# Altium PCB Pallette v1.PcbDoc
Units mm, origin at the board's own origin, x right, y up, seen from the top; angles counter-clockwise.
Board outline 152.4 x 101.6 mm, 2 copper layers (Top Layer, Bottom Layer); 44 components, 34 nets, 202 pads, 0 vias.
Unrouted connection lines stored in the file: 137.
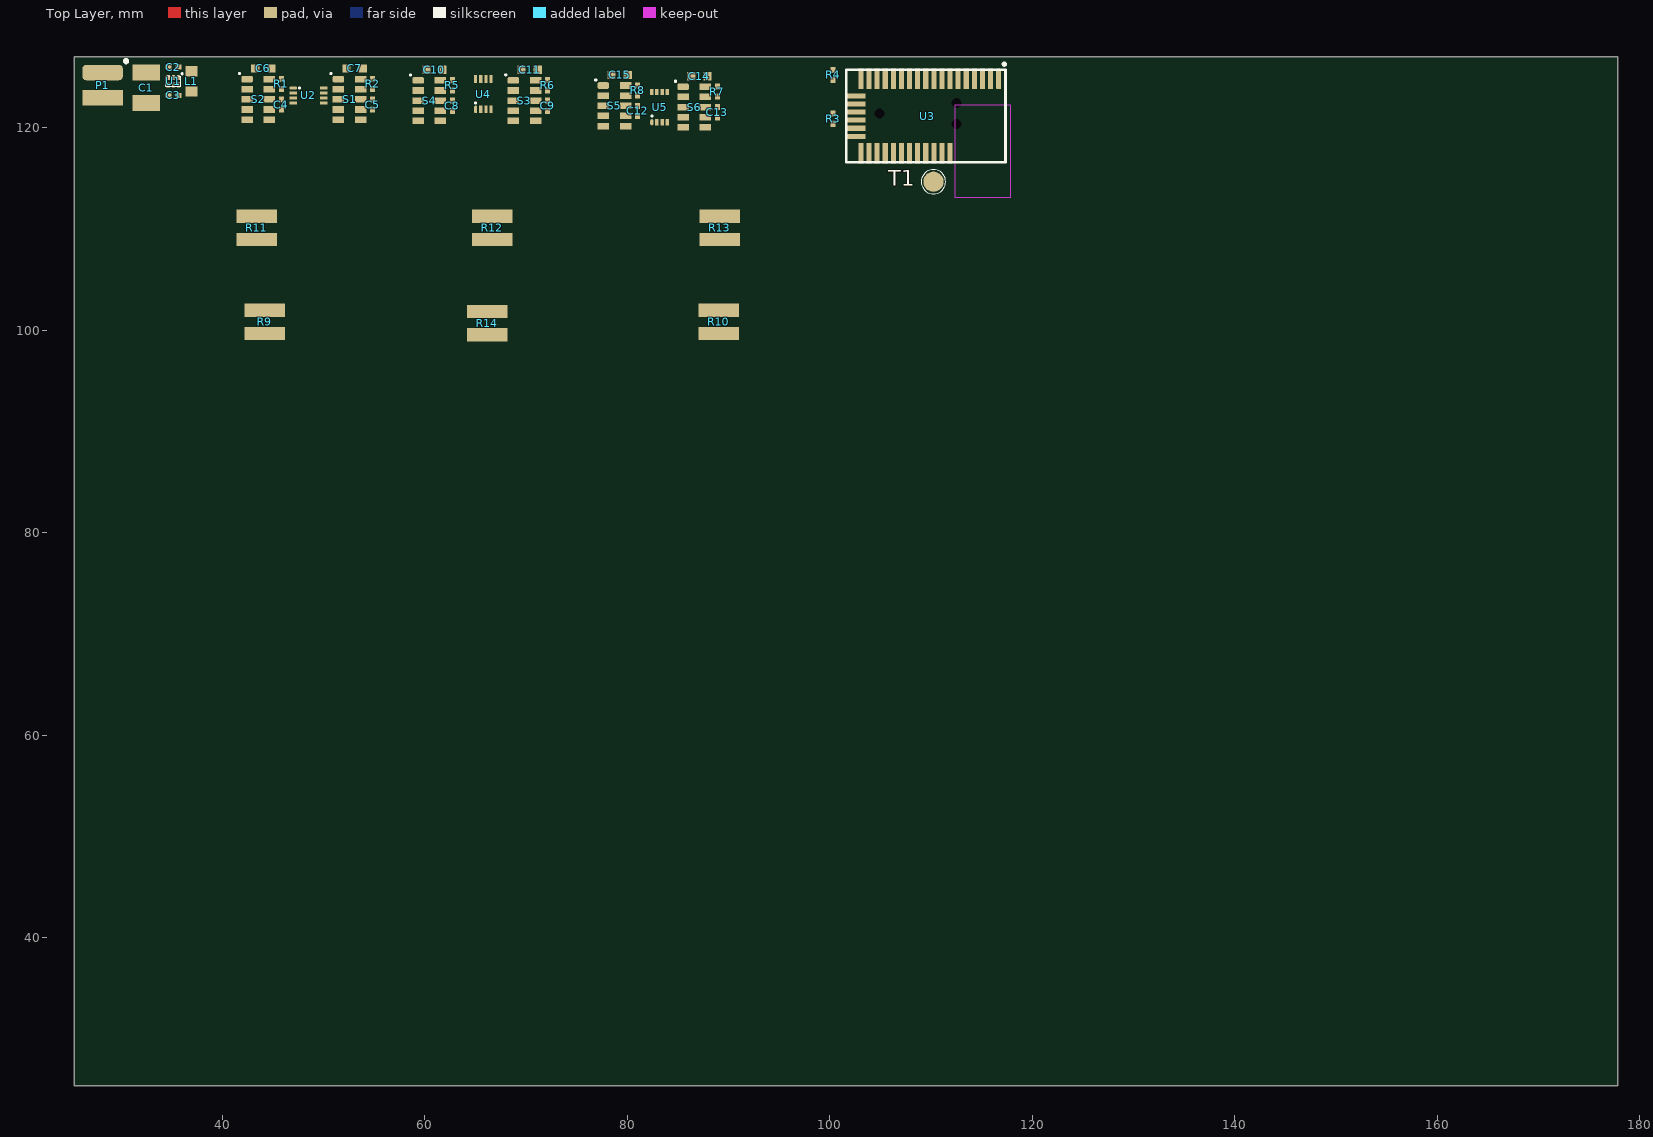
[diagram p0: Top Layer view]
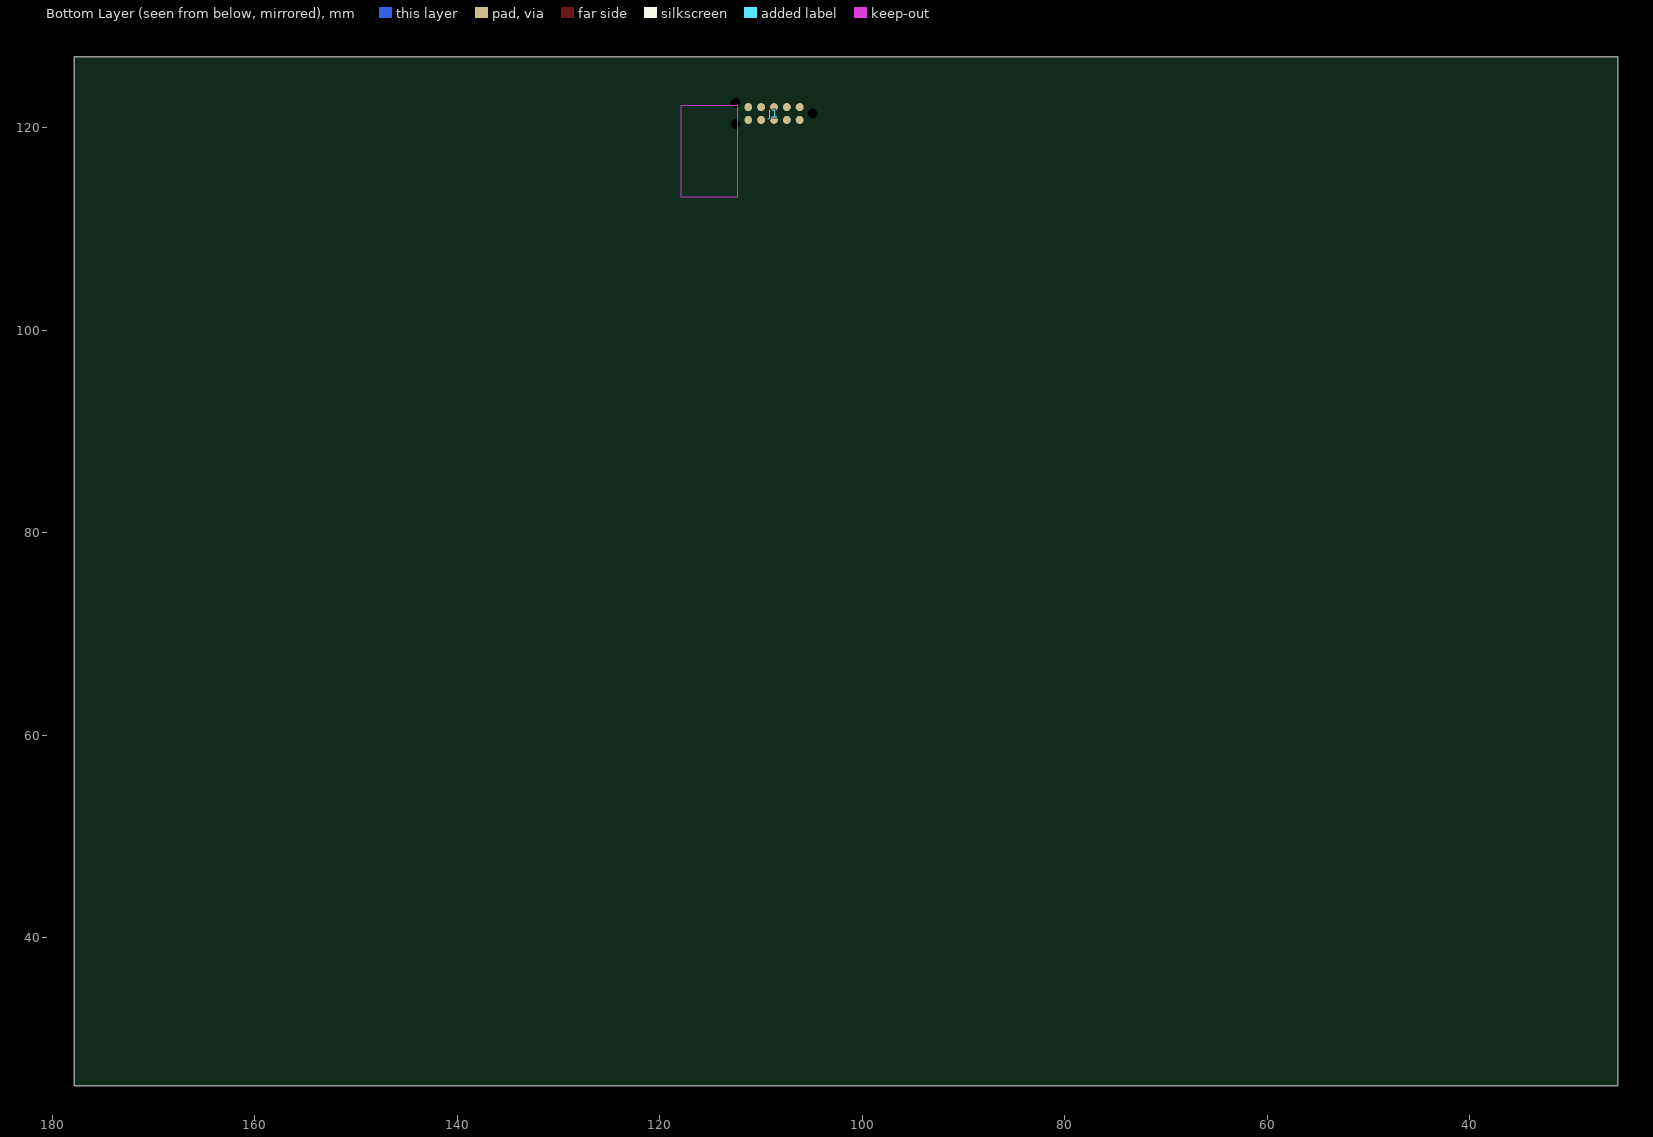
[diagram p1: Bottom Layer view, seen from below]

## Layer stack, top to bottom
Top Solder: solder mask 0.0102, Solder Resist, Dk 3.5
Top Layer: signal copper 0.0356
Dielectric 1: dielectric 0.32, FR-4, Dk 4.8
Bottom Layer: signal copper 0.0356
Bottom Solder: solder mask 0.0102, Solder Resist, Dk 3.5

## Board outline
25.4,25.4 177.8,25.4 177.8,127 25.4,127

## Design rules (kind name [scope] priority, off if disabled: settings)
Clearance [All] p1: gap=0.125
ComponentClearance [All] p1: gap=0.1 collisioncheckmode=3 verticalgap=0.1 showdistances=FALSE
MinimumSolderMaskSliver [All] p1: minsoldermaskwidth=0.125
PolygonConnect [All] p1: connectstyle=Relief reliefconductorwidth=0.254 reliefentries=4 polygonreliefangle="90 Angle" airgapwidth=0.254
RoutingVias [All] p1: holewidth=0.711 width=1.27 viastyle="Through Hole" minholewidth=0.711 minwidth=1.27 maxholewidth=0.711 maxwidth=1.27
SolderMaskExpansion [All] p1: expansion=0.102
Width [All] p1: maxlimit=2.54 minlimit=0.254 preferedwidth=0.508
28 further rules are at their usual default settings.

## Components (designator, comment, footprint, x,y, rotation, side; value= is the part's Value field where it differs from the comment)
C1 "Cap Pol 100uF" 1411 32.512,123.952 r270 top
C2 "Cap 2.2uF" 0402 35.179,125.984 r180 top
C3 "Cap 2.2uF" 0402 35.179,123.19 r0 top
C4 "Cap 100nF" 0402 45.847,122.301 r270 top
C5 "Cap 100nF" 0402 54.864,122.301 r270 top
C6 "Cap 22uF" 0603 44.069,125.857 r0 top
C7 "Cap 22uF" 0603 53.086,125.857 r0 top
C8 "Cap 100nF" 0402 62.738,122.174 r270 top
C9 "Cap 100nF" 0402 72.136,122.174 r270 top
C10 "Cap 22uF" 0603 60.96,125.73 r0 top
C11 "Cap 22uF" 0603 70.358,125.73 r0 top
C12 "Cap 100nF" 0402 81.026,121.666 r90 top
C13 "Cap 100nF" 0402 88.9,121.539 r90 top
C14 "Cap 22uF" 0603 87.122,125.095 r0 top
C15 "Cap 22uF" 0603 79.248,125.222 r0 top
J1 "Header Program" TC2050-IDC-NL 108.712,121.412 r0 bottom
L1 "Ind 2.2uH" 0805 36.957,124.587 r270 top
P1 "Header Battery" "Battery Leads" 28.194,124.206 r0 top
R1 "Res 30R" 0402 45.847,124.333 r270 top
R2 "Res 30R" 0402 54.864,124.333 r270 top
R3 "Res 4.7K" 0402 100.33,120.904 r90 top
R4 "Res 4.7K" 0402 100.33,125.222 r90 top
R5 "Res 30R" 0402 62.738,124.206 r270 top
R6 "Res 30R" 0402 72.136,124.206 r270 top
R7 "Res 30R" 0402 88.9,123.571 r270 top
R8 "Res 30R" 0402 81.026,123.698 r270 top
R9 "FSR 400 Short" "FSR 400 Short" 44.196,100.838 r0 top
R10 "FSR 400 Short" "FSR 400 Short" 89.027,100.838 r0 top
R11 "FSR 400 Short" "FSR 400 Short" 43.434,110.109 r0 top
R12 "FSR 400 Short" "FSR 400 Short" 66.675,110.109 r0 top
R13 "FSR 400 Short" "FSR 400 Short" 89.154,110.109 r0 top
R14 "FSR 400 Short" "FSR 400 Short" 66.167,100.711 r0 top
S1 "Si1141-M01" SI1141-M01 52.578,122.809 r0 top
S2 "Si1141-M01" SI1141-M01 43.561,122.809 r0 top
S3 "Si1141-M01" SI1141-M01 69.85,122.682 r0 top
S4 "Si1141-M01" SI1141-M01 60.452,122.682 r0 top
S5 "Si1141-M01" SI1141-M01 78.74,122.174 r0 top
S6 "Si1141-M01" SI1141-M01 86.614,122.047 r0 top
T1 "TP" TP 110.236,114.681 r90 top
U1 "TPS62730" 6-UFDFN 35.179,124.587 r180 top
U2 "74LVC2G125" VSSOP8#1 48.514,123.19 r270 top
U3 "BLE113" BLE113-A 109.601,121.158 r270 top
U4 "74LVC2G125" VSSOP8#1 65.786,123.317 r0 top
U5 "74LVC2G125" VSSOP8#2 83.185,122.047 r0 top

## Footprints (in the part's own frame and the unit in brackets; to place one, negate y for a bottom-side part, rotate by r counter-clockwise, add the part's x,y. Pads: shape width x height; smd on the part's side, far side on the other; paste and mask are expansions set on the pad)
6-UFDFN [mm] "Body 1.5x1.0mm"
  rrect50% 0.3x0.5 smd mask+0.05: 1(-0.5,-0.375)
  rect 0.3x0.5 smd mask+0.05: 2(0,-0.375) 3(0.5,-0.375) 4(0.5,0.375) 5(0,0.375) 6(-0.5,0.375)
  silkscreen extent -0.9,-0.77 0.75,0.5, body extent -0.75,-0.5 0.75,0.5, height 0.6
0402 [mm] "Body 1.0x0.5mm, IPC High Density"
  rect 0.6x0.5 smd: 1(-0.5,0) 2(0.5,0)
  body extent -0.55,-0.3 0.55,0.3, height 1.3
0603 [mm] "Body 1.6x0.8mm, IPC High Density"
  rect 0.8x0.8 smd: 1(-0.8,0) 2(0.8,0)
  body extent -0.81,-0.46 0.81,0.46, height 1.3
0805 [mm] "Body 2.0x1.25mm, IPC High Density"
  rect 1x1.2 smd: 1(-1,0) 2(1,0)
  body extent -1.02,-0.56 1.02,0.56, height 1.3
1411 [mm] "Body 3.5x2.8mm, IPC High Density"
  rect 1.6x2.7 smd: 1(-1.5,0) 2(1.5,0)
  body extent -1.52,-1.4 1.52,1.4, height 1.3
"Battery Leads" [mm]
  rrect50% 4x1.524 smd: 1(0,1.25)
  rect 4x1.524 smd: 2(0,-1.25)
  silkscreen extent 2.27,2.32 2.38,2.43
BLE113-A [mm] "Body 15.725x9.15mm"
  rrect50% 2x0.5 smd: 1(-3.675,7.075)
  rect 2x0.5 smd: 2(-3.675,6.275) 3(-3.675,5.475) 4(-3.675,4.675) 5(-3.675,3.875) 6(-3.675,3.075) 7(-3.675,2.275) 8(-3.675,1.475) 9(-3.675,0.675) 10(-3.675,-0.125) 11(-3.675,-0.925) 12(-3.675,-1.725) 13(-3.675,-2.525) 14(-3.675,-3.325) 15(-3.675,-4.125) 16(-3.675,-4.925) 17(-3.675,-5.725) 18(-3.675,-6.525) 25(3.675,-6.525) 26(3.675,-5.725) 27(3.675,-4.925) 28(3.675,-4.125) 29(3.675,-3.325) 30(3.675,-2.525) 31(3.675,-1.725) 32(3.675,-0.925) 33(3.675,-0.125) 34(3.675,0.675) 35(3.675,1.475) 36(3.675,2.275)
  rect 0.5x2 smd: 19(-2,-7.075) 20(-1.2,-7.075) 21(-0.4,-7.075) 22(0.4,-7.075) 23(1.2,-7.075) 24(2,-7.075)
  Keep-Out Layer region: -1.075,2.75 8.025,2.75 8.025,8.25 -1.075,8.25
  silkscreen extent -5.25,-7.97 4.57,7.75, body extent -4.57,-7.97 4.57,7.75, height 1.9
"FSR 400 Short" [mm] "5mm Circle x 20mm"
  rect 4x1.3 smd: 1(0,1.15) 2(0,-1.15)
  body extent -17.8,-3.8 -2,3.8, height 0.3
SI1141-M01 [mm] "Body 4.9x2.85mm"
  rrect50% 1.15x0.65 smd: 1(-1.1,2)
  rect 1.15x0.65 smd: 2(-1.1,1) 3(-1.1,0) 4(-1.1,-1) 5(-1.1,-2) 6(1.1,-2) 7(1.1,-1) 8(1.1,0) 9(1.1,1) 10(1.1,2)
  silkscreen extent -1.87,2.53 -1.83,2.57, body extent -1.43,-2.45 1.43,2.45, height 1.3
TC2050-IDC-NL [mil] "Programming pads"
  round 0 hole 39 paste-50 mask+0: 0(-150,0) 0(150,-40) 0(150,40)
  round 31 smd paste-50: 1(-100,-25) 2(-50,-25) 3(0,-25) 4(50,-25) 5(100,-25) 6(100,25) 7(50,25) 8(0,25) 9(-50,25) 10(-100,25)
TP [mm] "Test point"
  round 2 smd paste-10: 1(0,0)
  silkscreen extent -1.2,-1.2 1.2,1.2
VSSOP8#1 [mm] "Body 2.1x2.4mm"
  oval 0.3x0.75 smd mask+0.05: 1(-0.75,-1.5)
  rect 0.3x0.75 smd mask+0.05: 2(-0.25,-1.5) 3(0.25,-1.5) 4(0.75,-1.5) 5(0.75,1.5) 6(0.25,1.5) 7(-0.25,1.5) 8(-0.75,1.5)
  silkscreen extent -0.77,-0.9 -0.73,-0.85, body extent -1,-1.2 1,1.2, height 1
VSSOP8#2 [mm] "Body 2.1x2.4mm"
  oval 0.35x0.6 smd mask+0.05: 1(-0.75,-1.5)
  rect 0.35x0.6 smd mask+0.05: 2(-0.25,-1.5) 3(0.25,-1.5) 4(0.75,-1.5) 5(0.75,1.5) 6(0.25,1.5) 7(-0.25,1.5) 8(-0.75,1.5)
  silkscreen extent -0.77,-0.9 -0.72,-0.85, body extent -1,-1.2 1,1.2, height 1

## Part data
C1: "100uF Polarized Capacitor"
C2 C3: "2.2uF Capacitor"
C4 C5 C8 C9 C12 C13: "100nF Capacitor"
C6 C7 C10 C11 C14 C15: "22uF Capacitor"
J1: "CCDebugger Programming Header"
L1: "2.2uH Inductor"
P1: "Battery Leads"
R1 R2 R5 R6 R7 R8: "30R Resistor"
R3 R4: "4.7K Resistor"
R9 R10 R11 R12 R13 R14: "FSR 400 Short Force sensing resistor"
S1 S2 S3 S4 S5 S6: "Si1141-M01 IR Light Sensor"
T1: "Test point"
U1: "TPS62730 2.1V Step-Down Converter"
U2 U4 U5: "74LVC2G125 Dual bus buffer/line driver 3-state"
U3: "BLE113 Bluetooth Smart Module"

## Nets (pads, with @x,y where several pads share a name; then routed paths per layer and width w, separated by ;. In a path a pad name is that pad's centre, name@x,y a point inside that pad or via, vN(x,y) a via of type N, cw(c..) or ccw(c..) an arc to the next point about the centre after c; other vN are vias at no path point)
+2V1: C3.2 C4.2 C5.2 C8.2 C9.2 C12.2 C13.2 J1.2 L1.2 R1.2 R2.2 R3.2 R4.2 R5.2 R6.2 R7.2 R8.2 S1.4 S1.6 S1.7 S2.4 S2.6 S2.7 S3.4 S3.6 S3.7 S4.4 S4.6 S4.7 S5.4 S5.6 S5.7 S6.4 S6.6 S6.7 U1.6 U2.8 U3.8 U3.17 U4.8 U5.8
FSR1: R9.2 U3.33
FSR2: R10.2 U3.32
FSR3: R11.2 U3.31
FSR4: R12.2 U3.30
FSR5: R13.2 U3.29
FSR6: R14.2 U3.28
GND: C1.2 C2.1 C3.1 C4.1 C5.1 C6.1 C7.1 C8.1 C9.1 C10.1 C11.1 C12.1 C13.1 C14.1 C15.1 J1.1 P1.2 R9.1 R10.1 R11.1 R12.1 R13.1 R14.1 S1.8 S2.8 S3.8 S4.8 S5.8 S6.8 U1.4 U2.4 U3.1 U3.2 U3.3 U3.4 U3.5 U3.6 U3.7 U3.11 U3.13 U3.18 U3.25 U3.26 U3.27 U3.36 U4.4 U5.4
NetC6_2: C6.2 R1.1 S2.10
NetC7_2: C7.2 R2.1 S1.10
NetC10_2: C10.2 R5.1 S4.10
NetC11_2: C11.2 R6.1 S3.10
NetC14_2: C14.2 R7.1 S6.10
NetC15_2: C15.2 R8.1 S5.10
NetL1_1: L1.1 U1.2
NetS1_3: S1.3 U2.6
NetS2_3: S2.3 U2.3
NetS3_3: S3.3 U4.6
NetS4_3: S4.3 U4.3
NetS5_3: S5.3 U5.6
NetS6_3: S6.3 U5.3
NetT1: U3.34
P1_7/DCDC: U1.5 U3.12
P2_1/PROG: J1.4 U3.10
P2_2/PROG: J1.3 U3.9
S1_EN: U2.1 U3.24
S2_EN: U2.7 U3.23
S3_EN: U3.22 U4.1
S4_EN: U3.21 U4.7
S5_EN: U3.20 U5.1
S6_EN: U3.19 U5.7
SCL: R3.1 U2.2 U2.5 U3.14 U4.2 U4.5 U5.2 U5.5
SDA: R4.1 S1.2 S2.2 S3.2 S4.2 S5.2 S6.2 U3.15
VBAT: C1.1 C2.2 P1.1 U1.3
pads on no net: J1.0 J1.5 J1.6 J1.7 J1.8 J1.9 J1.10 S1.1 S1.5 S1.9 S2.1 S2.5 S2.9 S3.1 S3.5 S3.9 S4.1 S4.5 S4.9 S5.1 S5.5 S5.9 S6.1 S6.5 S6.9 T1.1 U1.1 U3.16 U3.35